# Altium PCB DMX Interface.PcbDoc (part 3 of 3)
Units mm, origin at the board's own origin, x right, y up, seen from the top; angles counter-clockwise.
Board outline 110 x 81.5 mm, 4 copper layers (Top Layer, Int1 (GND), Int2 (PWR), Bottom Layer), stack 1.586 mm thick; 144 components, 113 nets, 496 pads, 326 vias.
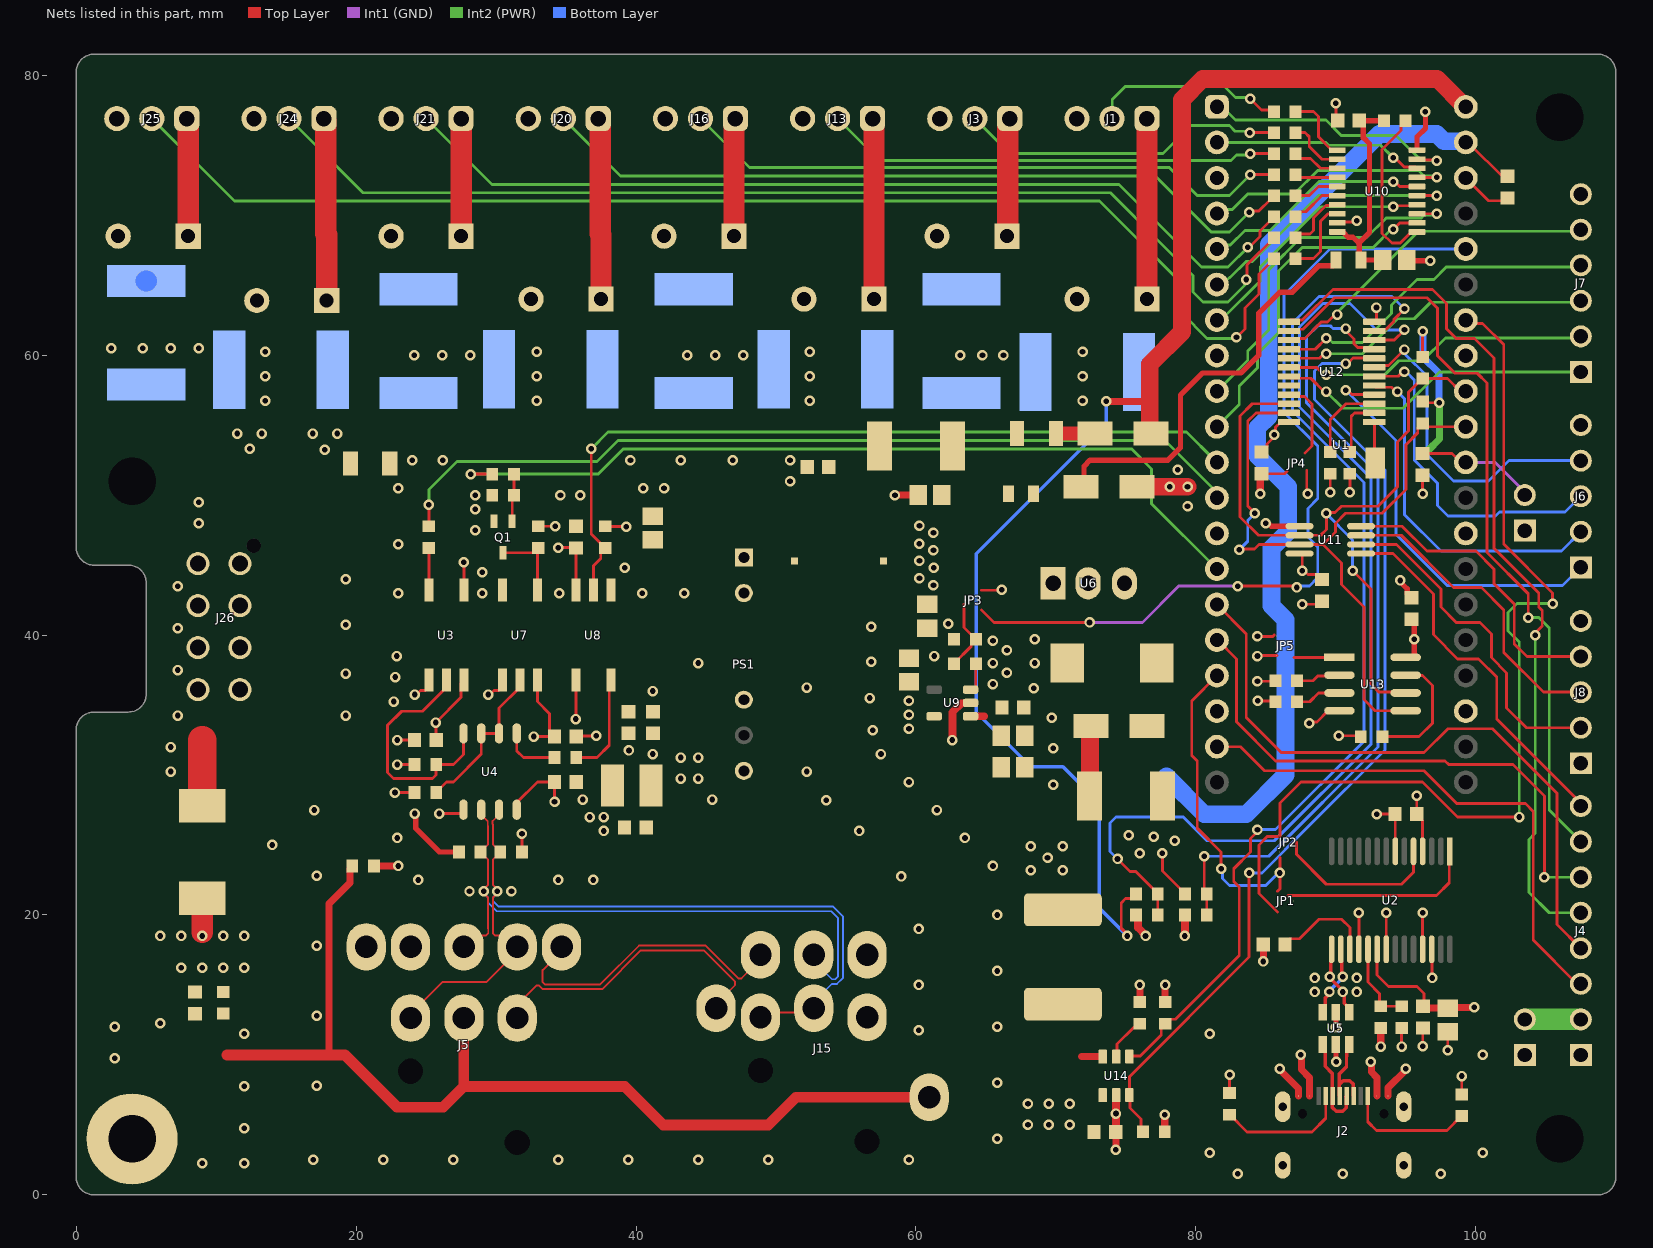
[diagram p4: the nets of this part, all layers, seen from the top]

## Part data (continued)
U12: library part CMP-015-00012-2, "16-bit 1.65- to 5.5-V I2C/SMBus I/O expander with interrupt, weak pull-up & config registers", Case/Package=TSSOP, Max Operating Temperature=85°C, Max Supply Voltage=5.5V, Min Operating Temperature=-40°C, Min Supply Voltage=1.65V, Nominal Supply Voltage=1.8V, Pins=24, RoHS Compliant=Yes
U13: library part CMP-019-00078-2, "M24C02 Series 2 Kb (256 x 8) 1.8 V SMT Serial I²C Bus EEPROM - SOIC-8", Case/Package=SOIC, Clock Frequency=400kHz, JLCPN=C83836, Max Operating Temperature=85°C, Max Supply Voltage=5.5V, Min Operating Temperature=-40°C, Min Supply Voltage=1.8V, FREQUENCY=400kHz, Memory Format=EEPROM, Memory Size=256B, Mounting Technology="Surface Mount", Pins=8
U14: library part CMP-019-00083-1, "IC PWR SWITCH N-CHAN 1: 1 SOT23-6 Power Switch/Driver 1: 1 N-Channel 1.5A SOT-23-6", Case/Package=SOT-23, Max Operating Temperature=85°C, Max Supply Voltage=6.5V, Min Operating Temperature=-40°C, Min Supply Voltage=2.5V, Pins=6

## Via types
v1: diameter 0.75, hole 0.4, Top Layer to Bottom Layer, tented both sides, 322 vias
v2: diameter 0.75, hole 0.4, Top Layer to Bottom Layer, 4 vias

## Nets (pads, with @x,y where several pads share a name; then routed paths per layer and width w, separated by ;. In a path a pad name is that pad's centre, name@x,y a point inside that pad or via, vN(x,y) a via of type N, cw(c..) or ccw(c..) an arc to the next point about the centre after c; other vN are vias at no path point)
3V3: C10.1 C22.2 C31.2 C32.1 C33.1 C40.2 C42.2 C43.2 C44.1 J4.2 J9.2 JP4.3 JP5.3 L1.1 R1.2 R14.2 R27.2 R28.2 R33.1 R34.1 R35.2 U2.4 U2.20 U3.1 U8.6 U9.5 U11.8 U12.24 U13.8 | length 56
  Top Layer w0.203: U3.1@27.7,43.225 v1(27.7,45.2) ; R1.2@33,47.775 v1(34.225,47.775) ; v1(34.45,46.25) 35.675,46.25 C10.1@35.7,46.225 U8.6@35.7,43.225 ; R14.2@37.8,47.775 37.825,47.75 v1(39.3,47.75) ; v1(84.4,36.7) 85.648,36.7 R33.1@85.683,36.735 ; v1(84.4,38.5) 84.435,38.535 JP5.3@85.783,38.535 ; v1(84.427,35.294) 85.624,35.294 R34.1@85.683,35.235 ; C43.2@84.7,53.075 C43.2@84.725,53.075 ; C43.2@85.073,53.442 85.073,53.639 85.505,54.071 85.505,54.205 v1(85.6,54.3) 85.695,54.395 85.695,54.845 86.075,55.225 U12.24@86.65,55.225 ; U11.8@87.4,45.825 87.509,45.825 87.6,45.734 v1(87.6,44.6) 87.734,44.6 88.011,44.323 88.652,44.323 C42.2@89,43.975 ; 87.922,51.778 87.922,50.178 v1(88,50.1) ; U2.20@92.948,17.551 92.948,15.704 93.751,14.901 95.793,14.901 96.293,14.401 96.293,13.551 C32.1@96.218,13.476 C32.1@96.345,13.35 ; U13.8@94.987,38.405 95.462,38.405 U13.8@95.6,38.543 ; C44.1@95.4,41.125 C44.1@95.425,41.1 ; C44.1@95.4,41.4 C44.1@95.575,41.225 ; C44.1@95.575,40.925 C44.1@95.6,40.9 ; v1(95.784,28.517) 95.784,27.166 96.198,26.752 U2.4@96.198,24.551 ; R28.2@96.2,56.675 96.275,56.6 v1(97.4,56.6) ; R27.2@96.2,59.875 v1(96.2,61.7) ; C31.2@98,13.35 C31.2@98.05,13.4
  Top Layer w0.381: U13.8@95.6,38.543 C44.1@95.6,40.9
  Top Layer w0.508: R35.2@77.8,13.775 v1(77.8,15) ; C32.1@96.345,13.35 C31.2@98,13.35 ; C31.2@98.05,13.4 v1(99.9,13.4)
  Int2 (PWR) w0.508: 96.6,53.2 97.4,54 v1(97.4,56.6)
  Int2 (PWR) w1.524: J9.2@103.5,12.54 J4.2@107.5,12.54
  Bottom Layer w0.508: v1(96.2,61.7) 96.237,61.663 96.237,59.847 97.363,58.721 97.363,56.637 v1(97.4,56.6)
  other v1: 59.5,33.3 59.5,34.3 59.5,35.3 95.6,39.7 61.25,43.55 60.25,44.05 61.269,44.819 60.25,45.3 61.25,46.05 60.231,46.531 61.25,47.3 60.25,47.8
3V3ISO: C5.2 C8.1 C9.2 C12.1 C13.2 C14.2 C16.2 PS1.7 R7.2 R8.2 R10.2 U3.6 U4.8 U7.6 U8.1 | length 26.6
  Top Layer w0.203: v1(22.775,28.75) R7.2@24.175,28.75 ; v1(22.95,30.75) R8.2@24.175,30.75 ; C5.2@25.725,32.5 25.7,32.525 v1(25.7,33.75) 27.502,35.552 27.502,36.577 U3.6@27.7,36.775 ; U4.8@31.48,27.525 31.48,28.03 32.95,29.5 C8.1@34.2,29.5 ; v1(32.7,32.75) C9.2@34.175,32.75 33.827,33.098 33.827,34.373 32.95,35.25 U7.6@32.95,36.775 ; v1(34.175,28.1) C8.1@34.175,29.5 ; v1(35.7,34) U8.1@35.7,36.775
  Top Layer w0.381: v1(24.2,27.25) 24.263,27.187 24.263,26.187 25.95,24.5 R10.2@27.35,24.5
  other v1: 43.2,29.75 44.45,29.75 43.2,31.25 44.45,31.25 41.2,31.5 39.494,31.752
5V_LOGIC: C17.1 D2.2 D4.1 L2.2 L3.1 U6.3 | length 30
  Top Layer w0.381: D2.2@71.585,50.385 72,50.8 72,52.054 72.446,52.5 78.008,52.5 78.9,53.392 78.9,57.15 80.47,58.72 83.22,58.72 84.5,60 84.5,63 86,64.5 86.9,64.5 88.79,66.39 89.79,66.39 90,66.6 L3.1@90,66.8
5V_LVL_SHIFT: C23.2 C41.2 L3.2 R5.2 U10.20 | length 15.8
  Top Layer w0.381: U10.20@90.1,68.8 90.5,68.8 90.881,68.419 91.22,68.419 91.639,68 ; C41.2@93.35,66.8 L3.2@91.8,66.8 91.668,66.932 91.668,67.768 91.668,67.972 91.639,68 ; R5.2@93.425,76.75 C23.2@91.675,76.75 91.96,76.466 91.96,75.54 92.4,75.1 92.4,68.761 91.639,68
AuxDMX_n: J5.5PIN_4 J15.5PIN_4 | length 21.7
  Top Layer w0.132: J5.5PIN_4@31.51,12.64 31.51,13.595 32.867,14.952 33.086,14.952 33.339,14.699 37.573,14.699 40.348,17.474 44.839,17.474 47.077,15.236 47.077,14.997 45.72,13.64 J15.5PIN_4@45.72,13.34
AuxDMX_p: J5.5PIN_5 J15.5PIN_5 | length 21.7
  Top Layer w0.132: J5.5PIN_5@34.68,17.72 34.68,17.42 33.323,16.063 33.323,15.189 33.478,15.034 37.434,15.034 40.209,17.809 44.978,17.809 47.314,15.473 47.533,15.473 48.89,16.83 J15.5PIN_5@48.89,17.15
BTN_DOWN: J6.1 U12.4 | length 29.2
  Top Layer w0.203: v1(90.7,57.5) 90.834,57.5 91.159,57.175 U12.4@92.75,57.175
  Bottom Layer w0.203: v1(90.7,57.5) 94.3,53.9 94.3,47.2 97.957,43.543 106.203,43.543 J6.1@107.5,44.84
BTN_ESC: J6.4 U12.7 | length 23.2
  Top Layer w0.203: U12.7@92.75,59.125 92.873,59.248 93.748,59.248 v1(94.9,60.4)
  Bottom Layer w0.203: v1(94.9,60.4) 94.995,60.305 94.995,60.005 96.5,58.5 96.5,52.898 98.398,51 100.9,51 102.36,52.46 J6.4@107.5,52.46
BTN_SELECT: J6.3 U12.6 | length 24
  Top Layer w0.203: U12.6@92.75,58.475 92.762,58.488 94.453,58.488 94.766,58.8 v1(94.9,58.8)
  Bottom Layer w0.203: v1(94.9,58.8) 95.034,58.8 95.6,58.234 95.6,52.5 97.255,50.845 97.255,49.245 98,48.5 101.4,48.5 101.7,48.8 106.38,48.8 J6.3@107.5,49.92
BTN_UP: J6.2 U12.5 | length 25.1
  Top Layer w0.203: U12.5@92.75,57.825 92.873,57.702 93.964,57.702 94.266,57.4 v1(94.4,57.4)
  Bottom Layer w0.203: v1(94.4,57.4) 94.4,57.389 94.9,56.889 94.9,48.6 97.5,46 106.12,46 J6.2@107.5,47.38
CHGND: C1.1 J5.G J15.G PTH3.1 R3.2 R4.1 | length 73.4
  Top Layer w0.508: 18.05,10 18.05,20.8 19.554,22.304 19.554,23.329 R3.2@19.725,23.5
  Top Layer w0.762: 10.775,10 18.05,10 19.2,10 22.926,6.274 26.224,6.274 27.7,7.75 ; J5.G@27.7,12.64 27.7,7.75 ; J15.G@60.95,6.98 51.43,6.98 49.45,5 41.95,5 39.2,7.75 27.7,7.75
  other v1: 9,2.25 12,2.25 12,4.75 12,7.75 2.75,9.75 12,11.5 2.75,12 6,12.25
DISPLAY.BL: J4.8 U11.1 | length 26.8
  Top Layer w0.203: U11.1@91.8,45.825 94.075,45.825 96.966,42.934 96.966,40.034 98.7,38.3 100.2,38.3 101.5,37 101.5,34 107.5,28 J4.8@107.5,27.78
DISPLAY.CS: J4.7 U12.14 | length 55.6
  Top Layer w0.203: U12.14@86.65,61.725 86.773,61.848 87.648,61.848 89.9,64.1 96.5,64.1 97.25,63.35 97.25,59.95 98.5,58.7 100.1,58.7 100.8,58 100.8,45.9 103.75,42.95 v1(103.75,41.25)
  Int2 (PWR) w0.203: v1(103.75,41.25) 104.5,41.25 105.25,40.5 105.25,27.49 J4.7@107.5,25.24
DISPLAY.DC: J4.6 U1.16 | length 39.1
  Top Layer w0.203: U1.16@81.5,39.64 81.56,39.64 82.9,38.3 82.9,33.8 85.693,31.007 97.793,31.007 98.06,30.74 102.66,30.74 104.9,28.5 v1(104.9,22.7)
  Int2 (PWR) w0.203: v1(104.9,22.7) J4.6@107.5,22.7
DISPLAY.MOSI: J4.4 U1.15 | length 46.6
  Top Layer w0.203: U1.15@81.5,42.18 83.6,40.08 83.6,34.1 86.1,31.6 96.3,31.6 98,33.3 101.2,33.3 105.8,28.7 105.8,19.32 J4.4@107.5,17.62
DISPLAY.RES: J4.5 U12.13 | length 63
  Top Layer w0.203: U12.13@86.65,62.375 86.773,62.498 87.598,62.498 89.8,64.7 96.9,64.7 97.911,63.689 97.911,61.889 98.6,61.2 99.9,61.2 101.3,59.8 101.3,46.2 104.5,43 104.5,42 104.75,41.75 104.75,40.648 104.25,40.148 v1(104.25,40)
  Int2 (PWR) w0.203: v1(104.25,40) 104.25,25.85 103.8,25.4 103.8,21.6 105.24,20.16 J4.5@107.5,20.16
DISPLAY.SCK: J4.3 U1.19 | length 38.4
  Top Layer w0.203: U1.19@81.5,32.02 83.18,32.02 84.9,30.3 96.3,30.3 98.64,27.96 103.54,27.96 104.1,27.4 104.1,18.2 107.22,15.08 J4.3@107.5,15.08
DMX.EN: R12.1 U1.14 | length 60.6
  Top Layer w0.203: v1(28.2,51.5) R12.1@29.725,51.5
  Int2 (PWR) w0.203: v1(28.2,51.5) 37.3,51.5 39.081,53.281 75.419,53.281 76.835,51.865 76.835,49.385 U1.14@81.5,44.72
DMX.RX: R14.1 U1.11 U8.5 | length 57.5
  Top Layer w0.203: v1(36.8,53.3) 36.8,47.225 37.477,46.548 37.477,46.523 R14.1@37.775,46.225 ; U8.5@36.95,43.725 U8.5@36.95,43.225 U8.5@36.95,43.725 ; U8.5@36.95,43.725 36.95,44.95 37.477,45.477 37.477,45.927 R14.1@37.775,46.225 ; R14.1@37.775,46.225 R14.1@37.8,46.225 R14.1@37.775,46.225
  Int2 (PWR) w0.203: v1(36.8,53.3) 38,54.5 79.34,54.5 81.311,52.529 U1.11@81.5,52.34
DMX.TX: R9.1 U1.12 | length 62.3
  Top Layer w0.203: R9.1@25.2,47.775 v1(25.2,49.3)
  Int2 (PWR) w0.203: v1(25.2,49.3) 25.2,50.4 27.2,52.4 37.2,52.4 38.7,53.9 77.8,53.9 80.8,50.9 80.8,50.891 81.5,50.191 U1.12@81.5,49.8
DMX_n: J5.3PIN_2 J5.5PIN_2 J15.3PIN_2 J15.5PIN_2 R11.2 U4.7 | length 58.8
  Top Layer w0.132: J5.5PIN_2@23.89,12.64 23.89,12.94 26.15,15.2 29.29,15.2 31.51,17.42 J5.3PIN_2@31.51,17.72 ; U4.7@30.21,27.525 30.21,27.179 29.743,26.711 29.743,26.492 29.768,26.467 29.768,25.039 29.922,24.884 29.941,24.884 30.3,24.525 R11.2@30.3,24.5 30.3,24.475 29.941,24.116 29.922,24.116 29.768,23.961 29.768,23.449 29.767,22.164 30.075,21.856 v1(30.075,21.7) 30.075,21.544 29.767,21.236 29.767,19.184 29.773,19.179 29.773,18.698 29.94,18.53 J5.3PIN_2@30.7,18.53 ; J15.3PIN_2@48.89,12.7 49.21,13.02 52.38,13.02 J15.5PIN_2@52.7,13.34
  Bottom Layer w0.132: v1(30.075,21.7) 30.075,21.544 29.767,21.236 29.767,21.012 30.179,20.6 30.8,20.6 54.083,20.6 54.775,19.908 54.775,15.495 54.358,15.077 54,15.077 52.7,13.777 J15.5PIN_2@52.7,13.34
DMX_p: J5.3 J15.3 R10.1 U4.6 | length 45.2
  Top Layer w0.132: J5.3@27.7,17.72 28.51,18.53 29.27,18.53 29.437,18.698 29.437,19.04 29.432,19.045 29.432,21.236 29.125,21.544 v1(29.125,21.7) 29.125,21.856 29.432,22.164 29.432,23.587 29.432,23.961 29.278,24.116 29.259,24.116 28.9,24.475 R10.1@28.9,24.5 ; R10.1@28.9,24.525 29.259,24.884 29.278,24.884 29.432,25.039 29.432,26.329 29.407,26.354 29.407,26.711 28.94,27.179 U4.6@28.94,27.525
  Bottom Layer w0.132: v1(29.125,21.7) 29.125,21.544 29.432,21.236 29.432,20.873 30.04,20.265 30.8,20.265 53.944,20.265 54.44,19.769 54.44,15.634 54.219,15.413 54,15.413 52.7,16.713 J15.3@52.7,17.15
EN_GATE: Q1.G R2.2 R12.2 | length 3.4
  Top Layer w0.203: Q1.G@31.15,48.125 31.15,49.875 R2.2@31.275,50 R12.2@31.275,51.5
EN_LDO: R26.2 U9.3 | length 2.1
  Top Layer w0.203: U9.3@63.9,36.1 64.08,36.1 64.275,36.295 R26.2@64.275,37.95
EN_LED: Q1.D R1.1 U7.1 | length 5.6
  Top Layer w0.203: Q1.D@30.5,45.875 32.625,45.875 R1.1@32.95,46.2 ; U7.1@32.95,43.225 32.95,46.175 R1.1@33,46.225
EXP_P12: J7.5 U12.15 | length 24.2
  Top Layer w0.203: U12.15@86.65,61.075 86.773,61.198 87.798,61.198 88.96,62.36 89.412,62.36 89.952,62.9 v1(90.1,62.9)
  Int2 (PWR) w0.203: v1(90.1,62.9) 90.1,63.048 95.9,68.848 107.388,68.848 J7.5@107.5,68.96
EXP_P13: J7.4 U12.16 | length 23.9
  Top Layer w0.203: U12.16@86.65,60.425 88.525,60.425 v1(89.3,61.2)
  Int2 (PWR) w0.203: v1(89.3,61.2) 89.448,61.2 89.748,60.9 91.9,60.9 93.985,62.985 93.985,63.585 95.8,65.4 97,65.4 97.892,66.292 107.372,66.292 J7.4@107.5,66.42
EXP_P14: J7.3 U12.17 | length 22.6
  Top Layer w0.203: U12.17@86.65,59.775 88.827,59.775 89.152,60.1 v1(89.3,60.1)
  Int2 (PWR) w0.203: v1(89.3,60.1) 91.9,60.1 94.4,62.6 95.6,62.6 96.781,63.781 107.401,63.781 J7.3@107.5,63.88
EXP_P15: J7.2 U12.18 | length 22.2
  Top Layer w0.203: U12.18@86.65,59.125 86.663,59.113 88.64,59.113 89.152,58.6 v1(89.3,58.6)
  Int2 (PWR) w0.203: v1(89.3,58.6) 93.496,58.6 94.496,59.6 96.2,59.6 97.825,61.225 107.385,61.225 J7.2@107.5,61.34
EXP_P16: J7.1 U12.19 | length 22.9
  Top Layer w0.203: U12.19@86.65,58.475 86.773,58.352 88.202,58.352 89.154,57.4 v1(89.3,57.4)
  Int2 (PWR) w0.203: v1(89.3,57.4) 90.5,56.2 94.795,56.2 97.395,58.8 J7.1@107.5,58.8
EXP_P17: U12.20 | length 0.1
  Top Layer w0.203: U12.20@86.65,57.825 U12.20@86.748,57.727
FTDI.RX: JP1.3 JP2.1 U1.34 | length 70
  Top Layer w0.203: 85.825,20.201 84.502,21.524 84.502,25.002 85.1,25.6 86,25.6 JP2.1@86,25.9 86,28 87.5,29.5 96.2,29.5 98.7,27 v1(103.1,27) ; U1.34@99.28,62.5 99.517,62.263 100.487,62.263 102,60.75 102,46.5 105.485,43.015 105.485,42.265 v1(105.5,42.25)
  Int2 (PWR) w0.203: v1(103.1,27) 103.1,39.5 102.3,40.3 102.3,41.6 102.95,42.25 v1(105.5,42.25)
FTDI.TX: JP1.1 JP2.3 U1.17 | length 23.3
  Top Layer w0.203: U1.17@81.5,37.1 79.7,35.3 79.7,31.4 80.1,31 80.1,26.2 81.8,24.5 v1(81.8,23.3) ; JP1.1@85.825,21.7 86,21.875 86,24.109
  Bottom Layer w0.203: v1(81.8,23.3) 81.905,23.195 81.905,22.595 82.4,22.1 84.989,22.1 85.889,23 v1(86,23)
GND: C1.2 C2.1 C3.2 C4.1 C6.2 C7.2 C10.2 C11.2 C15.1 C17.2 C18.2 C22.1 C23.1 C24.2 C26.2 C28.2 C29.2 C30.2 C31.1 C32.2 C33.2 C34.2 C36.2 C38.1 C39.1 C40.1 C41.1 C42.1 C43.1 C44.2 C45.1 D1.2 J1.3 J2.1 J2.2 J2.3 J2.4 J2.A1B12 J2.B1A12 J3.3 J4.1 J6.5 J7.6 J8.1 J8.5 J9.1 J13.3 J14.1 J16.3 J20.3 J21.3 J24.3 J25.3 J26.1 J26.2 J26.3 J26.4 JP4.1 JP5.1 PS1.2 Q1.S R2.1 R4.2 R22.2 R23.2 R25.1 R29.2 R30.2 R31.1 R32.2 R36.2 R37.1 R38.2 R40.1 R42.1 U1.3 U1.8 U1.13 U1.18 U1.23 U1.28 U1.33 U1.38 U2.7 U2.18 U2.21 U2.25 U2.26 U5.2 U6.2 U7.3 U8.4 U9.2 U10.10 U10.19 U11.5 U12.12 U13.4 U14.2 | length 76.8
  Top Layer w0.203: U7.3@30.45,43.225 U7.3@30.45,43.725 ; C10.2@35.5,47.975 C10.2@35.7,47.775 ; U8.4@38.2,43.225 U8.4@38.2,43.725 ; v1@39.2,44.725 v1(39.2,44.8) ; R31.1@62.723,39.698 R31.1@62.725,39.7 ; R22.2@82.409,7.284 v1(82.409,8.592) ; v1(84.4,39.9) 85.5,39.9 85.6,40 ; C43.1@84.7,51.525 86.325,51.525 JP4.1@86.5,51.7 ; v1(87.6,42.2) 88.775,42.2 C42.1@89,42.425 ; v1(88.1,33.7) 88.195,33.795 88.644,33.795 89.444,34.595 U13.4@90.255,34.595 ; v1(89.6,50.2) R30.2@89.6,51.525 ; v1(90,78) 90,76.875 C23.1@90.125,76.75 ; U10.19@90.1,69.45 90.173,69.523 91.423,69.523 v1(91.5,69.6) ; v1(90.2,32.8) 91.721,32.8 R32.2@91.78,32.741 ; v1(91,50.2) R29.2@91,51.525 ; U2.18@91.648,17.551 v1(91.648,20.148) ; U12.12@92.75,62.375 92.802,62.375 92.9,62.473 v1(92.9,63.4) ; v1(92.908,27.209) C33.2@94.216,27.209 ; U2.21@93.598,17.551 v1(93.598,20.148) ; C33.2@94.225,27.2 94.248,27.177 U2.7@94.248,24.551 ; v1(94.7,10.6) 94.7,11.908 R25.1@94.718,11.926 ; U2.25@96.198,17.551 v1(96.198,20.148) ; v1(96.2,50.1) C30.2@96.2,51.425 ; v1(96.209,10.609) C32.2@96.209,11.917 ; U2.26@96.848,17.551 96.874,17.525 96.874,15.526 v1(96.9,15.5) ; v1(97.991,10.333) C31.1@97.991,11.641 ; R23.2@98.993,7.185 v1(98.993,8.493) ; U1.38@99.28,72.66 100.915,71.025 C29.2@102.1,71.025
  Top Layer w0.35: v1@89.999,11.994 U5.2@90,13.044
  Top Layer w0.381: C15.1@41.2,48.5 C15.1@41.5,48.8 ; v1(85,48) 85.148,48 85.373,47.775 U11.5@87.4,47.775 ; v1(94.6,43.9) 94.6,43.8 95.09,43.31 95.09,42.96 95.375,42.675 C44.2@95.4,42.675 ; C41.1@95.05,66.8 95.1,66.75 v1(96.75,66.75) ; U10.10@95.8,74.65 95.8,75.6 96.4,76.2 v1(96.4,77.4)
  Top Layer w0.508: v1(58.5,50) C2.1@60.15,50 ; v1(74.285,3.226) C4.1@74.285,4.451 ; R37.1@76,13.775 v1(76,15) ; R38.2@77.775,4.5 v1(77.775,5.725) ; v1(84.6,50.1) C43.1@84.6,51.425 ; v1(84.818,16.676) C34.2@84.818,17.901 ; v1(86,9) 86,8.935 87.325,7.61 J2.A1B12@87.325,7.068 ; J2.B1A12@93.725,7.069 93.725,7.659 95,8.935 v1(95,9)
  Top Layer w0.559: v1(62.6,32.5) 62.6,34.475 63.255,35.129 63.879,35.129 U9.2@63.9,35.15 ; C4.1@74.275,4.5 74.287,4.513 74.287,7.113 U14.2@74.3,7.125 ; R42.1@75.725,20 75.871,19.854 75.871,19.081 76.4,18.552 v1(76.4,18.5) ; v1(79.2,18.5) 79.212,18.513 79.212,19.987 R40.1@79.225,20
  Top Layer w1.524: v1@9,18.75 D1.2@9,21.2
  other v1: 83,1.5 90.5,1.5 97.5,1.5 81,3 100.5,3 65.8,4 74.287,5.813 65.8,8 100.5,10 81,11.5 89.999,11.994 65.8,12 88.5,14.5 91.5,14.5 88.5,15.5 91.5,15.5 65.8,16 7.5,16.225 9,16.225 10.5,16.225 12,16.225 6,18.5 7.5,18.5 9,18.5 10.5,18.5 12,18.5 65.8,20 65.5,23.5 14,25 63.5,25.5 17,27.5 61.5,27.5 69.8,29.3 59.5,29.5 6.75,30.25 57.5,31.5 69.8,31.9 6.75,32 56.9,33.2 69.7,34.1 7.25,34.25 19.25,34.25 56.7,35.5 68.4,36.2 19.25,37.25 7.25,37.5 68.5,38 56.8,38.1 61.3,38.5 68.5,39.7 7.25,40.5 56.8,40.6 19.25,40.75 62.3,40.8 23,43 29,43 34.5,43 40.45,43 43.45,43 7.25,43.5 19.25,44 29,44.5 23,46.5 28.5,47.5 8.75,48 28.5,49 8.75,49.5 28.5,50 34.6,50 36,50 23,50.5 40.5,50.5 42,50.5 51,51 24,52.5 26.2,52.5 39.6,52.5 43.2,52.5 46.9,52.5 51,52.5
GNDISO: C5.1 C8.2 C9.1 C12.2 C13.1 C14.1 C16.1 J5.3PIN_1 J5.5PIN_1 J15.3PIN_1 J15.5PIN_1 PS1.5 R3.1 R11.1 U3.4 U4.5 U7.4 | length 11.8
  Top Layer w0.203: v1(22.95,32.5) C5.1@24.175,32.5 ; v1(24.2,35.75) 24.324,35.75 24.6,36.026 24.951,36.026 25.2,36.275 U3.4@25.2,36.775 ; v1(25.95,27.25) 27.51,27.25 27.67,27.41 U4.5@27.67,27.525 ; v1(29.45,35.75) 29.574,35.75 29.85,36.026 30.201,36.026 30.45,36.275 U7.4@30.45,36.775 ; R11.1@31.85,24.5 v1(31.85,25.8) ; C8.2@35.725,29.5 C8.2@36.073,29.152 ; C9.1@35.725,32.75 35.77,32.795 v1(37.144,32.795) ; v1@36.073,28.498 36.2,28.371 v1(36.2,28.25)
  Top Layer w0.508: R3.1@21.275,23.5 v1(23,23.5)
  other v1: 16.95,2.5 21.95,2.5 26.95,2.5 34.45,2.5 39.45,2.5 44.45,2.5 49.45,2.5 59.5,2.5 17.2,7.805 60.2,11.75 17.2,12.805 60.2,15 17.2,17.805 60.2,19 28.1,21.7 31.1,21.7 24.45,22.5 34.45,22.5 36.95,22.5 58.95,22.75 17.2,22.805 22.95,25.5 37.7,26 55.95,26 36.7,27 37.7,27 53.6,28.2 45.45,28.25 52.2,30.25 22.7,35.25 41.2,36 52.2,36.25 22.8,37 44.45,38 22.9,38.5
I2C.SCL: R27.1 U1.32 U11.6 U12.22 U13.6 | length 53.2
  Top Layer w0.203: U12.22@86.65,56.525 84.025,56.525 83.156,55.656 83.156,48.444 84.475,47.125 U11.6@87.4,47.125 88.925,47.125 89.337,47.537 89.337,48.663 v1(89.3,48.7) 89.344,48.744 89.944,48.744 90.4,49.2 93,49.2 94.4,50.6 94.4,53.8 95.2,54.6 95.2,57.35 96.175,58.325 R27.1@96.2,58.325 97.984,58.325 98.889,57.42 U1.32@99.28,57.42 ; v1(91.2,44.6) 92.5,43.3 92.5,36.5 93.068,35.932 94.92,35.932 U13.6@94.987,35.865
  Bottom Layer w0.203: v1(89.3,48.7) 91.2,46.8 v1(91.2,44.6)
I2C.SDA: R28.1 U1.31 U11.7 U12.23 U13.5 | length 51.1
  Top Layer w0.203: v1(83.1,46.1) 83.152,46.152 84.186,46.152 84.509,46.475 U11.7@87.4,46.475 89.075,46.475 ; v1(84.2,48.7) 84.2,48.713 83.702,49.211 83.702,55.295 84.282,55.875 U12.23@86.65,55.875 ; U13.5@94.987,34.595 92.805,34.595 92,35.4 92,42 90.4,43.6 90.4,45.15 89.075,46.475 ; U1.31@99.28,54.88 96.445,54.88 R28.1@96.2,55.125 96.175,55.125 95.852,54.802 95.852,54.452 95,53.6 95,50.4 93.3,48.7 90.7,48.7 89.974,47.974 89.974,47.374 89.075,46.475
  Bottom Layer w0.203: v1(83.1,46.1) 83.7,46.7 83.7,48.189 84.2,48.689 v1(84.2,48.7)
LED.1: U1.1 U10.9 | length 18.7
  Top Layer w0.203: U10.9@95.8,74 95.85,73.95 97.15,73.95 v1(97.2,73.9)
  Int2 (PWR) w0.203: U1.1@81.5,77.74 81.891,77.74 82.831,76.8 89.286,76.8 90.386,75.7 94.3,75.7 96.1,73.9 v1(97.2,73.9)
LED.2: U1.2 U10.8 | length 15.3
  Top Layer w0.203: v1(94.1,74.1) 94.234,74.1 94.886,73.448 95.702,73.448 U10.8@95.8,73.35
  Int2 (PWR) w0.203: U1.2@81.7,75 U1.2@81.5,75.2 89.279,75.2 89.479,75 93.2,75 v1(94.1,74.1)
LED.3: U1.4 U10.7 | length 18.6
  Top Layer w0.203: U10.7@95.8,72.7 v1(97.2,72.7)
  Int2 (PWR) w0.203: U1.4@81.5,70.12 81.777,70.397 82.597,70.397 83.7,71.5 87,71.5 88.7,73.2 95.9,73.2 96.305,72.795 97.105,72.795 v1(97.2,72.7)
LED.4: U1.5 U10.6 | length 16.4
  Top Layer w0.203: v1(94.1,72.4) 94.218,72.4 94.568,72.05 U10.6@95.8,72.05
  Int2 (PWR) w0.203: U1.5@81.5,67.58 81.777,67.857 82.457,67.857 83.5,68.9 85.3,68.9 88.8,72.4 v1(94.1,72.4)
LED.5: U1.6 U10.5 | length 19.7
  Top Layer w0.203: U10.5@95.8,71.4 v1(97.2,71.4)
  Int2 (PWR) w0.203: U1.6@81.5,65.04 81.891,65.04 82.393,65.542 82.442,65.542 83.6,66.7 84.047,66.7 88.747,71.4 v1(97.2,71.4)
LED.6: U1.7 U10.4 | length 18.3
  Top Layer w0.203: v1(94.1,70.6) 94.175,70.675 95.725,70.675 U10.4@95.8,70.75
  Int2 (PWR) w0.203: U1.7@81.5,62.5 81.8,62.5 84.6,65.3 84.6,66.3 88.9,70.6 v1(94.1,70.6)
LED.7: U1.9 U10.3 | length 25.3
  Top Layer w0.203: U10.3@95.8,70.1 v1(97.2,70.1)
  Int2 (PWR) w0.203: U1.9@81.5,57.42 83.7,59.62 83.7,60.3 85.2,61.8 85.2,66.1 87.5,68.4 92.2,68.4 93.6,69.8 96.1,69.8 96.305,70.005 97.105,70.005 v1(97.2,70.1)
LED.8: U1.10 U10.2 | length 24.3
  Top Layer w0.203: v1(94.1,69) 94.118,69 94.568,69.45 U10.2@95.8,69.45
  Int2 (PWR) w0.203: U1.10@81.5,54.88 83.1,56.48 83.1,57.8 84.4,59.1 84.4,60.1 85.9,61.6 85.9,66 87.6,67.7 92.666,67.7 93.966,69 v1(94.1,69)
LED_OUT.1: J1.2 R21.2 | length 14.1
  Top Layer w0.203: v1(83.888,78.312) 84.677,77.523 85.452,77.523 R21.2@85.575,77.4
  Int2 (PWR) w0.203: J1.2@74,76.9 74.023,76.923 74.023,78.273 74.95,79.2 82.033,79.2 82.827,78.406 83.794,78.406 v1(83.888,78.312)
LED_OUT.2: J3.2 R20.2 | length 23.4
  Top Layer w0.203: v1(83.838,75.9) R20.2@85.575,75.9
  Int2 (PWR) w0.203: J3.2@64.2,76.9 66.7,74.4 77.65,74.4 79.65,76.4 82.4,76.4 82.805,75.995 83.743,75.995 v1(83.838,75.9)
LED_OUT.3: J13.2 R16.2 | length 32.6
  Top Layer w0.203: v1(83.873,74.4) R16.2@85.575,74.4
  Int2 (PWR) w0.203: J13.2@54.4,76.9 57.4,73.9 82.5,73.9 82.905,74.305 83.778,74.305 v1(83.873,74.4)
LED_OUT.4: J16.2 R19.2 | length 43.9
  Top Layer w0.203: v1(83.893,72.9) R19.2@85.575,72.9
  Int2 (PWR) w0.203: J16.2@44.6,76.9 48.1,73.4 78.1,73.4 80.1,71.4 82.393,71.4 v1(83.893,72.9)
LED_OUT.5: J20.2 R15.2 | length 55.2
  Top Layer w0.203: v1(83.8,70.2) 83.895,70.295 84.495,70.295 85.329,71.129 85.329,71.154 R15.2@85.575,71.4
  Int2 (PWR) w0.203: J20.2@34.8,76.9 38.9,72.8 77.1,72.8 81.1,68.8 82.4,68.8 v1(83.8,70.2)
LED_OUT.6: J21.2 R18.2 | length 66.7
  Top Layer w0.203: v1(83.7,67.7) 83.8,67.7 84.572,68.472 84.572,68.872 85.575,69.875 R18.2@85.575,69.9
  Int2 (PWR) w0.203: J21.2@25,76.9 29.7,72.2 74.5,72.2 80.4,66.3 82.3,66.3 v1(83.7,67.7)
LED_OUT.7: J24.2 R6.2 | length 79.2
  Top Layer w0.203: v1(83.6,65.4) 83.661,65.461 83.661,66.461 85.575,68.375 R6.2@85.575,68.4
  Int2 (PWR) w0.203: J24.2@15.2,76.9 20.5,71.6 73.9,71.6 79.8,65.7 79.8,64.5 80.5,63.8 82.3,63.8 83.505,65.005 83.505,65.305 v1(83.6,65.4)
LED_OUT.8: J25.2 R17.2 | length 92
  Top Layer w0.203: v1(82.897,61.272) 83.5,61.875 83.5,63.367 84.5,64.367 84.5,65.8 85.575,66.875 R17.2@85.575,66.9
  Int2 (PWR) w0.203: J25.2@5.4,76.9 11.3,71 73.1,71 79,65.1 79,63 80.8,61.2 82.825,61.2 v1(82.897,61.272)
NetC3_1: C3.1 F12.2 J13.1 | length 15.5
  Top Layer w1.524: J13.1@56.9,76.9 57,76.8 C3.1@57,64
  Bottom Layer w1.016: 56.9,74.346 J13.1@56.9,76.9
NetC6_1: C6.1 F17.1 J25.1 | length 11
  Top Layer w1.524: J25.1@7.9,76.9 8,76.8 C6.1@8,68.5
  Bottom Layer w1.016: J25.1@7.9,76.9 7.904,76.896 7.904,74.342
NetC7_1: C7.1 F16.2 J24.1 | length 15.6
  Top Layer w1.524: J24.1@17.7,76.9 17.838,76.762 17.838,68.666 17.9,68.604 C7.1@17.9,63.9
  Bottom Layer w1.016: 17.642,74.268 J24.1@17.642,76.822
NetC11_1: C11.1 F10.2 J1.1 | length 15.5
  Top Layer w1.524: C11.1@76.5,64 J1.1@76.5,76.9
  Bottom Layer w1.016: 76.523,74.257 J1.1@76.523,76.811
NetC15_2: C15.2 L1.2 PS1.1
NetC18_1: C18.1 F11.1 J3.1 | length 11
  Top Layer w1.524: C18.1@66.5,68.5 66.5,68.604 66.562,68.666 66.562,76.762 J3.1@66.7,76.9
  Bottom Layer w1.016: 66.7,74.346 J3.1@66.7,76.9
NetC24_1: C24.1 F13.1 J16.1 | length 11
  Top Layer w1.524: C24.1@47,68.5 47,76.8 J16.1@47.1,76.9
  Bottom Layer w1.016: 47.1,74.346 J16.1@47.1,76.9
NetC26_1: C26.1 F14.2 J20.1 | length 15.5
  Top Layer w1.524: J20.1@37.3,76.9 37.438,76.762 37.438,68.666 37.5,68.604 C26.1@37.5,64
  Bottom Layer w1.016: 37.3,74.346 J20.1@37.3,76.9
NetC28_1: C28.1 F15.1 J21.1 | length 11
  Top Layer w1.524: C28.1@27.5,68.5 J21.1@27.5,76.9
  Bottom Layer w1.016: 27.5,74.346 J21.1@27.5,76.9
NetC34_1: C34.1 U2.17 | length 7.2
  Top Layer w0.203: C34.1@86.368,17.901 86.368,17.926 86.742,18.3 87.4,18.3 88.8,19.7 90.4,19.7 90.998,19.102 U2.17@90.998,17.551
NetD3_1: D3.1 F18.1 | length 2.8
  Top Layer w1.016: F18.1@70,54.4 D3.1@72.8,54.4
NetD4_2: D4.2 F1.2 | length 5
  Top Layer w1.27: F1.2@72.385,28.5 72.442,28.557 72.442,33.442 D4.2@72.5,33.5
NetJP1_2: JP1.2 U2.1 | length 14.2
  Top Layer w0.203: 86.592,21.4 97.2,21.4 98.1,22.3 98.1,24.504 U2.1@98.148,24.551
NetJP2_2: JP2.2 U2.5 | length 12
  Top Layer w0.203: JP2.2@87.175,25.2 87.175,24.337 89.312,22.2 94.7,22.2 95.548,23.048 U2.5@95.548,24.551
NetJP3_1: JP3.1 U1.36 | length 61.9
  Top Layer w0.203: JP3.1@64.675,41.8 65.575,40.9 v1(72.4,40.9) ; v1(83,43.5) 87.1,43.5 v1(87.2,43.4)
  Int1 (GND) w0.203: v1(72.4,40.9) 76.174,40.9 78.774,43.5 v1(83,43.5)
  Bottom Layer w0.203: v1(87.2,43.4) 87.305,43.505 88.105,43.505 88.7,44.1 88.7,46.3 88,47 88,49.049 88.7,49.749 88.7,53.5 86.3,55.9 86.3,64.3 89.58,67.58 U1.36@99.28,67.58
NetJP3_2: JP3.2 R26.1 R31.2 | length 5.3
  Top Layer w0.203: R26.1@62.725,37.95 62.725,37.975 63.952,39.202 63.952,39.377 R31.2@64.275,39.7 64.275,39.725 63.952,40.048 63.927,40.048 63.425,40.55 63.425,42.2
NetJP4_2: JP4.2 U12.21 | length 5.6
  Top Layer w0.203: U12.21@86.65,57.175 86.773,57.052 87.748,57.052 88.3,56.5 88.3,53.5 87.8,53
NetJP5_2: JP5.2 U13.1 | length 3.3
  Top Layer w0.203: 87,38.405 U13.1@90.255,38.405
NetR5_1: R5.1 U10.1 | length 11.9
  Top Layer w0.203: R5.1@94.975,76.75 94.652,76.427 94.652,76.052 93.3,74.7 93.3,68.7 94,68 94.6,68 95.197,68.597 95.4,68.8 U10.1@95.8,68.8
NetR6_1: R6.1 U10.17 | length 4.5
  Top Layer w0.203: R6.1@87.125,68.4 87.387,68.662 88.162,68.662 88.4,68.9 88.4,69.8 89.3,70.7 90.05,70.7 U10.17@90.1,70.75
NetR7_1: R7.1 U4.2 U4.3 U7.5 | length 11.6
  Top Layer w0.203: R7.1@25.7,28.75 26.45,29.5 26.95,29.5 28.94,31.49 U4.3@28.94,32.975 U4.2@30.21,32.975 30.21,34.785 31.7,36.275 U7.5@31.7,36.775 ; R7.1@25.725,28.725 R7.1@25.725,28.75
NetR8_1: R8.1 U3.5 U4.4 | length 17.5
  Top Layer w0.203: R8.1@25.7,30.75 26.95,30.75 27.67,31.47 U4.4@27.67,32.975 ; R8.1@25.725,30.75 25.7,30.725 25.7,30 25.45,29.75 22.675,29.75 22.25,30.175 22.25,33.55 23.26,34.56 24.735,34.56 26.45,36.275 U3.5@26.45,36.775
NetR9_2: R9.2 U3.3 | length 3
  Top Layer w0.203: U3.3@25.2,43.225 R9.2@25.2,46.225
NetR13_1: R13.1 U8.3 | length 7.4
  Top Layer w0.203: R13.1@35.725,31.25 37.2,31.25 38.082,32.132 38.082,36.657 U8.3@38.2,36.775
NetR13_2: R13.2 U4.1 | length 4.2
  Top Layer w0.203: U4.1@31.48,32.975 31.48,31.72 31.95,31.25 R13.2@34.2,31.25
NetR15_1: R15.1 U10.15 | length 3.2
  Top Layer w0.203: R15.1@87.125,71.4 88.1,71.4 88.75,72.05 U10.15@90.1,72.05
NetR16_1: R16.1 U10.13 | length 3.4
  Top Layer w0.203: R16.1@87.125,74.4 87.125,74.375 87.448,74.052 88.198,74.052 88.9,73.35 U10.13@90.1,73.35
NetR17_1: R17.1 U10.18 | length 5.6
  Top Layer w0.203: R17.1@87.125,66.9 88.4,66.9 88.9,67.4 88.9,69.562 89.438,70.1 U10.18@90.1,70.1
NetR18_1: R18.1 U10.16 | length 3.6
  Top Layer w0.203: R18.1@87.125,69.9 87.125,69.923 87.448,70.246 87.846,70.246 89,71.4 U10.16@90.1,71.4
NetR19_1: R19.1 U10.14 | length 2.9
  Top Layer w0.203: R19.1@87.225,72.8 87.325,72.7 U10.14@90.1,72.7
NetR20_1: R20.1 U10.12 | length 4.2
  Top Layer w0.203: R20.1@87.125,75.9 87.8,75.9 88.1,75.6 88.1,74.9 89,74 U10.12@90.1,74
NetR21_1: R21.1 U10.11 | length 5
  Top Layer w0.203: R21.1@87.125,77.4 88.4,77.4 88.75,77.05 88.75,75.6 89.7,74.65 U10.11@90.1,74.65
NetR24_1: R24.1 R25.2 U2.19 | length 6
  Top Layer w0.203: U2.19@92.298,17.551 92.298,15.202 93.126,14.374 93.126,13.569 R24.1@93.218,13.476 R25.2@94.718,13.476
NetR29_1: R29.1 U12.2 | length 4.4
  Top Layer w0.203: R29.1@91,53.075 91.1,53.175 91.1,55.637 91.338,55.875 U12.2@92.75,55.875
NetR30_1: R30.1 U12.3 | length 5.9
  Top Layer w0.203: R30.1@89.6,53.075 89.6,55.4 90.725,56.525 U12.3@92.75,56.525
NetR32_1: R32.1 U13.7 | length 8.9
  Top Layer w0.203: R32.1@93.33,32.741 95.941,32.741 96.9,33.7 96.9,36.4 96.2,37.1 95.022,37.1 U13.7@94.987,37.135
NetR33_2: R33.2 U13.2 | length 3.2
  Top Layer w0.203: R33.2@87.233,36.735 88.369,36.735 88.703,37.068 90.188,37.068 U13.2@90.255,37.135
NetR34_2: R34.2 U13.3 | length 3.3
  Top Layer w0.203: R34.2@87.233,35.235 88.135,35.235 88.765,35.865 U13.3@90.255,35.865
NetTP1_1: TP1.1 U12.1 | length 2.9
  Top Layer w0.203: U12.1@92.75,55.225 92.75,52.35 TP1.1@92.8,52.3
PWM.1: J8.2 U11.2 | length 24.3
  Top Layer w0.203: U11.2@91.8,46.475 94.325,46.475 97.5,43.3 97.5,42 98.6,40.9 100.3,40.9 101.114,40.086 101.114,38.386 102.2,37.3 102.2,34.8 103.62,33.38 J8.2@107.5,33.38
PWM.2: J8.3 U11.3 | length 22.1
  Top Layer w0.203: U11.3@91.8,47.125 94.675,47.125 98.4,43.4 100.4,43.4 102,41.8 102,38.75 104.83,35.92 J8.3@107.5,35.92
PWM.3: J8.4 U11.4 | length 21.8
  Top Layer w0.203: U11.4@91.8,47.775 94.725,47.775 96.5,46 100,46 101.3,44.7 101.3,43.66 102.75,42.21 102.75,39.365 103.655,38.46 J8.4@107.5,38.46
RP_RUN: C30.1 J14.2 U1.30 | length 8.7
  Top Layer w0.203: C30.1@96.2,52.975 98.294,52.975 98.929,52.34 U1.30@99.28,52.34
  Int1 (GND) w0.203: U1.30@99.28,52.34 101.383,52.34 103.5,50.223 J14.2@103.5,50
USB2.D_N: U2.16 U5.3 | length 5.2
  Top Layer w0.247: U5.3@89.05,13.044 89.226,13.22 89.226,14.048 89.544,14.366 v1(89.544,14.502) ; U2.16@90.348,17.551 90.348,16.71 90.404,16.654 90.404,15.696 v1(90.5,15.6)
  Bottom Layer w0.247: v1(89.544,14.502) 89.544,14.573 90.5,15.529 v1(90.5,15.6)
USB2.D_P: U2.15 U5.1 | length 5.1
  Top Layer w0.247: U2.15@89.698,17.551 89.698,16.71 89.646,16.658 89.646,15.696 v1(89.55,15.6) 89.55,15.522 90.494,14.578 v1(90.494,14.5) 90.591,14.404 90.591,13.703 90.95,13.344 U5.1@90.95,13.044
USB2_CC1: J2.A5 R22.1 | length 9.4
  Top Layer w0.203: R22.1@82.4,5.725 82.425,5.725 83.65,4.5 88.3,4.5 89.275,5.475 J2.A5@89.275,7.069
USB2_CC2: J2.B5 R23.1 | length 9.2
  Top Layer w0.203: J2.B5@92.275,7.069 92.275,5.225 92.9,4.6 97.933,4.6 98.959,5.626 R23.1@98.984,5.626
USB2Conn.D_N: J2.A7 J2.B7 U5.4 | length 6.9
  Top Layer w0.247: U5.4@89.05,10.744 89.24,10.553 89.24,9.179 89.757,8.663 89.757,7.067 J2.B7@89.797,7.026 ; J2.B7@89.757,7.067 89.757,6.235 90.014,5.978 90.505,5.978 90.75,6.224 90.75,6.992 J2.A7@90.716,7.026
USB2Conn.D_P: J2.A6 J2.B6 U5.6 | length 6
  Top Layer w0.247: J2.A6@90.257,7.067 90.257,8.655 90.759,9.157 90.759,9.906 90.774,9.92 90.774,10.567 U5.6@90.95,10.744 ; 90.264,7.91 90.509,8.155 91,8.155 91.257,7.899 J2.B6@91.257,7.067
USB_LED_EN: R38.1 U12.8 U14.3 | length 69.6
  Top Layer w0.203: R38.1@76.225,4.5 76.079,4.646 76.079,5.421 75.297,6.203 75.297,6.878 75.25,6.925 75.25,8.444 83.8,16.994 v1(83.8,23) ; v1(90.7,59.4) 90.848,59.4 91.235,59.788 92.738,59.788 U12.8@92.75,59.775
  Bottom Layer w0.203: v1(83.8,23) 84.714,23 88.014,26.3 93.5,31.786 93.5,51.8 88.468,56.832 88.468,58.868 89,59.4 v1(90.7,59.4)
USB_LED_FLT: R35.1 U12.11 U14.4 | length 75.3
  Top Layer w0.203: U14.4@75.25,9.875 75.303,9.928 76.028,9.928 77.529,11.429 77.529,11.954 78.121,12.546 78.546,12.546 83.1,17.1 83.1,22 82.7,22.4 82.7,23.3 83.9,24.5 83.9,25.452 84.4,25.952 v1(84.4,26.1) ; U12.11@92.75,61.725 92.873,61.848 93.575,61.848 94.132,62.405 94.132,62.532 v1(94.9,63.3)
  Bottom Layer w0.203: v1(84.4,26.1) 85.693,26.1 92,32.407 92,50.9 86.9,56 86.9,62.3 88.8,64.2 94,64.2 v1(94.9,63.3)
USB_LED_ILIM: R37.2 U14.5 | length 2.6
  Top Layer w0.203: U14.5@74.3,9.875 74.372,9.947 74.372,10.772 R37.2@75.583,11.983
V_BUS_FTDI: C4.2 F1.1 J2.A4B9 J2.B4A9 R24.2 R39.2 U5.5 U14.1 | length 11.9
  Top Layer w0.203: v1(77.6,24.4) 77.614,24.386 77.614,23.136 79.225,21.525 R39.2@79.225,21.5
  Top Layer w0.35: U5.5@90,10.744 90.008,10.735 90.008,9.523 v1(90.017,9.515)
  Top Layer w0.508: v1(87.5,10) 87.546,9.954 87.546,8.954 88.125,8.375 J2.A4B9@88.125,7.068 ; v1(92.5,9.5) 92.546,9.454 92.546,8.776 92.925,8.397 J2.B4A9@92.925,7.069 ; v1(93.2,10.6) 93.209,10.609 93.209,11.917 R24.2@93.218,11.926
  other v1: 68,5 69.5,5 71,5 68,6.5 69.5,6.5 71,6.5 76,24.4 78.5,25.3 77,25.6 75.2,25.7
V_BUS_RPI: D3.2 R41.2 U1.40 | length 101.4
  Top Layer w0.203: v1(75.1,18.5) 75.1,18.613 74.661,19.052 74.661,20.861 74.977,21.177 75.427,21.177 75.725,21.475 R41.2@75.725,21.5
  Top Layer w0.508: v1(73.6,56.7) 76.7,56.7
  Top Layer w1.27: D3.2@76.8,54.4 76.7,54.5 76.7,56.7 76.7,59.351 79,61.651 79,78.25 80.488,79.738 97.234,79.738 U1.40@99.232,77.74
  Top Layer w1.524: U1.40@99.232,77.74 U1.40@99.28,77.74
  Bottom Layer w0.254: v1(73.6,56.7) 73.6,55.1 64.317,45.817 64.317,34.483 68.2,30.6 70.5,30.6 73.1,28 73.1,20.5 v1(75.1,18.5)
V_LED: C36.1 D1.1 F2.1 F9.1 F10.1 F11.2 F12.1 F13.2 F14.1 F15.2 F16.1 F17.2 F18.2 J26.5 J26.6 J26.7 J26.8 R36.1 | length 4.7
  Top Layer w2.032: D1.1@9,27.8 9,32.5
  other v1: 68.2,23.2 70.5,23.2 69.4,24.1 68.2,24.9 70.5,24.9 17.75,53.25 12.4,53.3 11.5,54.4 13.25,54.4 16.9,54.4 18.65,54.4 13.5,56.75 32.9,56.75 52.4,56.75 71.9,56.75 13.5,58.5 32.9,58.5 52.4,58.5 71.9,58.5 24.15,60 26.15,60 28.15,60 43.65,60 45.65,60 47.65,60 63.15,60 64.75,60 66.25,60 13.5,60.25 32.9,60.25 52.4,60.25 71.9,60.25 2.5,60.5 4.75,60.5 6.75,60.5 8.75,60.5
V_LOGIC_IN: C2.2 F9.2 L2.1 U6.1
V_SYS: C29.1 C38.2 C39.2 C45.2 D2.1 JP3.3 U1.39 U9.1 | length 78.4
  Top Layer w0.203: JP3.3@64.675,43.2 66.105,43.2 v1(66.142,43.237) ; U1.39@99.28,75.2 99.45,75.2 102.075,72.575 C29.1@102.1,72.575
  Top Layer w0.508: U9.1@63.9,34.2 64.9,34.2
  Top Layer w1.27: D2.1@75.8,50.6 v2(79.4,50.6)
  Bottom Layer w1.27: 77.9,29.9 80.6,27.2 83.6,27.2 86.4,30 86.4,41.1 85.4,42.1 85.4,46.2 86.6,47.4 86.6,50.6 84.39,52.81 84.39,54.801 85.2,55.611 85.2,67.9 93.1,75.8 97.211,75.8 97.729,75.282 99.198,75.282 U1.39@99.28,75.2
  other v1: 65.5,36.5 66.5,37.3 65.5,38 66.5,38.9 65.5,39.6
  other v2: 79.4,49.2 78.128,50.6 78.7,51.8
V_USB_LED: F2.2 U14.6 | length 1.5
  Top Layer w0.508: 71.825,9.875 U14.6@73.35,9.875
VBUS_FTDI_DET: R39.1 R40.2 U12.9 | length 57.5
  Top Layer w0.203: v1(80.6,24.2) 80.6,21.6 R39.1@80.7,21.5 ; R40.2@80.775,20 R39.1@80.775,21.5 ; v1(90.7,61.9) 90.7,61.752 91.29,61.162 91.29,60.81 91.562,60.538 92.637,60.538 U12.9@92.75,60.425
  Bottom Layer w0.203: v1(80.6,24.2) 85.207,24.2 93,31.993 93,51.5 87.9,56.6 87.9,61.3 88.7,62.1 89.6,62.1 89.8,61.9 v1(90.7,61.9)
VBUS_RPI_DET: R41.1 R42.2 U12.10 | length 74
  Top Layer w0.203: v1(74.4,24) 75.3,23.1 75.7,23.1 77.275,21.525 R41.1@77.275,21.5 R42.2@77.275,20 ; U12.10@92.75,61.075 94.175,61.075 v1(94.9,61.8)
  Bottom Layer w0.203: v1(74.4,24) 73.868,24.532 73.868,26.568 74.3,27 79.1,27 80.8,25.3 85.6,25.3 92.5,32.2 92.5,51.2 87.4,56.3 87.4,62.021 89.079,63.7 91,63.7 92.9,61.8 v1(94.9,61.8)
pads on no net: J2.A8 J2.B8 J2.NPTH1 J2.NPTH2 J5.NPTH1 J5.NPTH2 J15.NPTH1 J15.NPTH2 J26.9 PS1.6 PTH1.1 PTH2.1 PTH4.1 U1.20 U1.21 U1.22 U1.24 U1.25 U1.26 U1.27 U1.29 U1.35 U1.37 U2.2 U2.3 U2.6 U2.8 U2.9 U2.10 U2.11 U2.12 U2.13 U2.14 U2.22 U2.23 U2.24 U2.27 U2.28 U9.4

## Polygon pours and split planes (outlines as drawn)
V_SYS on Top Layer "V_SYS_L01_P2283" (solid, pour order 2283): 80.1,52.6 80.1,48.1 78.071,48.1 78.071,52.6
GND on Top Layer "GND_L01_P2280" (solid, pour order 2280): 101,0.72 80,0.72 80,12 87,12 87,8 94,8 94,12.401 101,12.401
GND on Top Layer "GND_L01_P2277" (solid, pour order 2277): 66.2,0.5 65.3,0.5 65.3,24.006 66.2,24.006
V_BUS_FTDI on Top Layer "V_BUS_FTDI_L01_P2275" (solid, pour order 2275): 73.672,3.5 66.8,3.5 66.8,7.5 73.672,7.5
V_USB_LED on Top Layer "V_USB_LED_L01_P2274" (solid, pour order 2274): 74.6,12 73.697,11.097 73.671,8.385 66.7,8.385 66.7,16 74.6,16
V_LED on Top Layer "V_LED_L01_P2273" (solid, pour order 2273): 72.9,24.1 74.2,22.8 74.2,17.791 66.7,17.791 66.7,25.8 72.9,25.8
V_SYS on Top Layer "V_SYS_L01_P2271" (solid, pour order 2271): 63.5,34.2 65,34.2 65,40.5 67,40.5 67,28.5 63.5,28.5
GND on Top Layer "GND_L01_P2249" (solid, pour order 2249): 63.4,41.4 63.4,35.15 62.9,35.15 62.9,28.2 70.5,28.2 70.5,26.2 66.2,26.2 66.2,22.5 65.229,22.5 56.4,31.535 56.4,41.4
3V3 on Top Layer "3V3_L01_P2246" (solid, pour order 2246): 61.662,37.3 61.662,32 60.2,32 57.6,34.6 57.6,37.3
V_BUS_FTDI on Top Layer "V_BUS_FTDI_L01_P2269" (solid, pour order 2269): 75.806,23.794 74.6,25 74.6,31.1 79.282,31.1 79.282,23.802
V_LOGIC_IN on Top Layer "V_LOGIC_IN_L01_P2251" (solid, pour order 2251): 66,41 66,44 62.5,44 62.5,49 60.5,49 60.5,55 65,55 65,51.2 67.1,51.2 67.1,46.7 70.559,46.7 70.5,41
V_LED on Top Layer "V_LED_L01_P2255" (solid, pour order 2255): 65.6,52.2 68.7,52.2 68.7,58.29 65.6,58.29
CHGND on Top Layer "CHGND_L01_P2265" (solid, pour order 2265): 1,1 1,13.475 13.458,13.475 13.458,1
3V3ISO on Top Layer "3V3ISO_L01_P2217" (solid, pour order 2217): 38.45,33.5 38.45,31.208 40.45,31.208 40.45,25 49.45,25 49.45,33.5
V_LED on Top Layer "V_LED_L01_P2242" (solid, pour order 2242): 18.4,29.5 8,29.5 8,34 10.1,34 10.1,56.5 20,56.5 20,45.25 18.4,45.25
GND on Top Layer "GND_L01_P2257" (solid, pour order 2257): 53,55.5 53,49.5 48,49.5 48,48 39.5,48 39.5,42.5 22,42.5 22,55.5
5V_LOGIC on Top Layer "5V_LOGIC_L01_P2250" (solid, pour order 2250): 73.529,31.6 73.529,45.071 71.2,47.1 67.529,47.1 67.529,51.9 74.1,51.9 74.1,49.3 78.2,49.3 78.2,31.6
V_LED on Top Layer "V_LED_L01_P2252" (solid, pour order 2252): 53.5,50.7 59.146,50.7 59.146,57 53.5,57
GND on Top Layer "GND_L01_P2247" (solid, pour order 2247): 72,35 70.5,35 70.5,27.7 67.5,27.7 67.5,40.5 72,40.5
GNDISO on Top Layer "GNDISO_L01_P2188" (solid, pour order 2188): 37.5,29.75 37.5,30.75 35.2,30.75 35.2,25 39.7,25 39.7,29.75
3V3 on Top Layer "3V3_L01_P2201" (solid, pour order 2201): 59.5,48.5 59.5,41.6 62,41.6 62,48.5
GNDISO on Top Layer "GNDISO_L01_P2210" (solid, pour order 2210): 38.95,38.536 38.95,34.286 52.787,34.286 52.787,38.536
NetC15_2 on Top Layer "NETC15_2_L01_P2221" (solid, pour order 2221): 48.5,47.5 48.5,48.5 51.5,48.5 51.5,41.75 39.95,41.75 39.95,47.5
GND on Top Layer "GND_L01_P2243" (solid, pour order 2243): 5.5,14 5.5,28.9 18,29 18,26.3 15.2,23.5 15.2,14
V_LED on Top Layer "V_LED_L01_P2241" (solid, pour order 2241): 1.75,62.4 72.7,62.4 72.7,56 1.75,56
CHGND on Int1 (GND) "CHGND_L02_P2266" (solid, pour order 2266): 1,1 1,13.475 13.458,13.475 13.458,1
GNDISO on Int1 (GND) "GNDISO_L02_P2222" (solid, pour order 2222): 21.2,40.25 21.2,29.2 15.2,23.2 15.2,1 64.2,1 64.2,22 55,31.2 55,40.008
GND on Int1 (GND) "GND_L02_P2229" (solid, pour order 2229): 4.734,81.5 107.46,81.5 cw(c107.46,78.96) 110,78.96 110,2.54 cw(c107.46,2.54) 107.46,0 64.2,0 64.2,22.034 55,31.234 55,40.008 33.442,40.008 21.2,40.008 21.2,29.7 15,23.5 15,14.25 0,14.25 0,32.191 cw(c2.309,32.191) 2.309,34.5 2.46,34.5 ccw(c2.46,37.04) 5,37.04 5,42.5 ccw(c2.5,42.5) 2.5,45 cw(c2.5,47.5) 0,47.5 0,78.96 cw(c2.54,78.96) 2.54,81.5
V_SYS on Bottom Layer "V_SYS_L04_P2282" (solid, pour order 2282): 80,52.5 72,52.5 65,45.5 65,35 68.7,31.3 70.7,31.3 73.7,28.3 73.7,27.8 80,27.8
NetC11_1 on Bottom Layer "NETC11_1_L04_P2233" (solid, pour order 2233): 79.6,57.5 79.6,79 75.5,79 75.5,76 73.506,74.006 73.3,57.5
NetC6_1 on Bottom Layer "NETC6_1_L04_P2234" (solid, pour order 2234): 7.132,79 7.132,75.632 4.15,72.65 4.15,63.1 10.9,63.1 10.9,79
GND on Bottom Layer "GND_L04_P2279" (solid, pour order 2279): 66.186,23.343 64.162,21.962 55.125,31 55.125,40.325 52.1,40.325 52.1,42.8 57.3,42.8 57.3,32.4
GND on Bottom Layer "GND_L04_P2278" (solid, pour order 2278): 66.2,0.5 64.6,0.5 64.6,24.006 66.2,24.006
GND on Bottom Layer "GND_L04_P2244" (solid, pour order 2244): 14.8,23.3 14.8,15.5 1.27,15.5 1.27,42.946 7.75,48.5 8.5,50.5 20.7,50.5 20.7,29.2
V_LED on Bottom Layer "V_LED_L04_P2276" (solid, pour order 2276): 35.8,57.5 35.8,55.6 39.4,55.6 39.4,57.9 43.05,57.9 43.05,54 32.65,54 32.65,57.5
V_LED on Bottom Layer "V_LED_L04_P2237" (solid, pour order 2237): 15,61.25 15,57 16.5,55.5 20.1,55.5 20.5,55.9 23.7,55.9 23.7,54.05 22.26,54.05 20.3,52 8.27,52 7.6,53.5 6,55 3.9,55.4 1,55.4 1,61.25
V_BUS_FTDI on Bottom Layer "V_BUS_FTDI_L04_P2248" (solid, pour order 2248): 74.5,24.9 75.5,23.9 75.5,10 67,10 67,4 84,4 84,8.5 94,8.5 94,12.5 82,12.5 82,21.5 79.5,24 79.5,25.444 78.6,26.4 74.5,26.4
V_LED on Bottom Layer "V_LED_L04_P2272" (solid, pour order 2272): 64,33.9 72.4,25.5 72.4,21.8 66.7,21.8 66.7,23.547 57.9,32.564 57.9,43.4 53,43.4 53,57 64,57
V_LED on Bottom Layer "V_LED_L04_P2240" (solid, pour order 2240): 72.65,61.25 72.65,55.65 64,47 62,47 62,61.25
CHGND on Bottom Layer "CHGND_L04_P2268" (solid, pour order 2268): 1,1 1,13.475 13.458,13.475 13.458,1
GND on Bottom Layer "GND_L04_P2262" (solid, pour order 2262): 82.5,1 101.5,1 101.5,8 109,8 109,21.5 82.5,21.5
GND on Bottom Layer "GND_L04_P2261" (solid, pour order 2261): 22.487,53.4 19.4,49.871 19.4,40.25 52.5,40.25 52.5,53.4
3V3ISO on Bottom Layer "3V3ISO_L04_P2260" (solid, pour order 2260): 21.385,40.25 21.2,40.065 21.2,23.8 55.2,23.8 55.2,40.25
V_LED on Bottom Layer "V_LED_L04_P2238" (solid, pour order 2238): 34.2,61.25 34.2,54 23.25,54 23.25,61.25
V_LED on Bottom Layer "V_LED_L04_P2239" (solid, pour order 2239): 54,61.25 54,54 42.5,54 42.5,61.25
NetC18_1 on Bottom Layer "NETC18_1_L04_P2236" (solid, pour order 2236): 65.932,79 65.932,75.932 62.75,72.75 62.75,67.5 62.5,67.25 62.5,63.5 69.7,63.5 69.7,79
NetC24_1 on Bottom Layer "NETC24_1_L04_P2235" (solid, pour order 2235): 46.332,79 46.332,75.832 43.35,72.85 43.35,63.5 50.1,63.5 50.1,79
NetC3_1 on Bottom Layer "NETC3_1_L04_P2232" (solid, pour order 2232): 60,58 60,79 55.9,79 55.9,75.429 54.5,73.929 54.5,58
NetC26_1 on Bottom Layer "NETC26_1_L04_P2231" (solid, pour order 2231): 40.6,58.3 40.6,79 36.3,79 36.3,75.8 35.5,75 35.5,58.3
NetC7_1 on Bottom Layer "NETC7_1_L04_P2230" (solid, pour order 2230): 21,58.2 21,79 16.7,79 16.7,75.676 15.9,74.973 15.9,58.2
NetC28_1 on Bottom Layer "NETC28_1_L04_P2225" (solid, pour order 2225): 26.732,79 26.732,75.732 23.75,72.75 23.75,63.5 30.5,63.5 30.5,79
CHGND on Int2 (PWR) "CHGND_L03_P2267" (solid, pour order 2267): 1,1 1,13.475 13.458,13.475 13.458,1
V_LED on Int2 (PWR) "V_LED_L03_P2264" (solid, pour order 2264): 18.5,34 10.1,34 10.1,56.5 21,56.5 21,45 18.5,45
V_LED on Int2 (PWR) "V_LED_L03_P2263" (solid, pour order 2263): 1.75,62.75 73.8,62.75 73.8,56 1.75,56
3V3 on Int2 (PWR) "3V3_L03_P2245" (solid, pour order 2245): 97.5,11 105,11 105,19.2 97.5,26.7 97.602,55.6 83,55.6 83,49 26.5,49 26.5,41.5 57.6,41.5 57.6,32.4 66.5,23.5 66.5,11
GNDISO on Int2 (PWR) "GNDISO_L03_P2223" (solid, pour order 2223): 21.385,40.25 21.2,40.065 21.2,29.25 15.2,23.25 15.2,1 64.2,1 64.2,22 55.2,31 55.2,40.25

## Keep-outs
Top Layer:
  circle w2.032: c54.5,45.3 r1.27
  region: 53.968,48.835 53.968,41.818 55.032,41.818 55.032,48.835
  lines w1.524: 15.2,8.25 15.207,1.158 ; 15.2,11.75 15.2,23.25 21.2,29.25 21.2,40.25 55.2,40.25 55.2,31 64.25,21.95 64.25,1
Int1 (GND):
  lines w1.524: 15.2,1 15.2,23.25 21.2,29.25 21.2,40.25 55.2,40.25 55.2,31 64.2,22 64.2,1.4
Int2 (PWR):
  lines w1.524: 15.2,1 15.2,23.25 21.2,29.25 21.2,40.25 55.2,40.25 55.2,31 64.2,22 64.2,1.4
Bottom Layer:
  circle w0.4: c4,51 r4
  lines w1.524: 15.2,1 15.2,23.25 21.2,29.25 21.2,40.25 55.2,40.25 55.2,31 64.2,22 64.2,1.4

## Other copper
Top Layer:
  region net 3V3: 58.551,47.986 58.551,47.05 60,47.05 60,47.986
  region net 3V3: 58.551,45.736 58.551,44.8 60,44.8 60,45.736
  region net 3V3: 57.551,48.55 57.551,42.05 59,42.05 59,48.55
  region net 3V3: 58.551,43.486 58.551,42.55 60,42.55 60,43.486
  region net NetC15_2: 49.5,43.486 49.5,42.55 50.949,42.55 50.949,43.486
  region net NetC15_2: 49.5,45.736 49.5,44.8 50.949,44.8 50.949,45.736
  region net NetC15_2: 49.5,47.986 49.5,47.05 50.949,47.05 50.949,47.986
  region net NetC15_2: 51.699,42.05 51.699,48.55 50.25,48.55 50.25,42.05
  region net V_BUS_FTDI: 93.225,6.419 93.225,7.719 92.925,7.719 92.625,7.719 92.625,6.419 92.925,6.419
  region net V_BUS_FTDI: 88.425,6.418 88.425,7.718 88.125,7.718 87.825,7.718 87.825,6.418 88.125,6.418
  region net GND: 87.625,6.419 87.625,7.719 87.325,7.719 87.325,7.718 87.025,7.718 87.025,6.418 87.325,6.418 87.325,6.419
  region net GND: 93.425,7.719 93.425,6.419 93.725,6.419 94.025,6.419 94.025,7.719 93.725,7.719
  region net NetJP1_2: 86.301,22.2 86.801,21.7 86.301,21.2 86.957,21.2 86.957,20.8 86.301,20.8 86.801,20.3 86.301,19.8 87.625,19.8 87.625,20.8 87.274,20.8 87.274,21.2 87.625,21.2 87.625,22.2
  region net FTDI.RX: 85.575,20.8 85.949,20.8 86.449,20.3 85.949,19.8 85.225,19.8 85.225,20.8
  region net FTDI.TX: 85.575,22.2 85.949,22.2 86.449,21.7 85.949,21.2 85.225,21.2 85.225,22.2
  region net NetJP3_2: 64.199,41.3 63.699,41.8 64.199,42.3 63.543,42.3 63.543,42.7 64.199,42.7 63.699,43.2 64.199,43.7 62.875,43.7 62.875,42.7 63.226,42.7 63.226,42.3 62.875,42.3 62.875,41.3
  region net NetJP3_1: 64.925,41.3 64.551,41.3 64.051,41.8 64.551,42.3 65.275,42.3 65.275,41.3
  region net V_SYS: 64.925,42.7 64.551,42.7 64.051,43.2 64.551,43.7 65.275,43.7 65.275,42.7
  region net NetJP5_2: 86.259,40.435 86.759,39.935 86.259,39.435 86.915,39.435 86.915,39.035 86.259,39.035 86.759,38.535 86.259,38.035 87.583,38.035 87.583,39.035 87.232,39.035 87.232,39.435 87.583,39.435 87.583,40.435
  region net 3V3: 85.533,39.035 85.907,39.035 86.407,38.535 85.907,38.035 85.183,38.035 85.183,39.035
  region net GND: 85.533,40.435 85.907,40.435 86.407,39.935 85.907,39.435 85.183,39.435 85.183,40.435
  region net FTDI.TX: 85.75,25 86.124,25 86.624,24.5 86.124,24 85.4,24 85.4,25
  region net FTDI.RX: 85.75,26.4 86.124,26.4 86.624,25.9 86.124,25.4 85.4,25.4 85.4,26.4
  region net NetJP2_2: 86.476,26.4 86.976,25.9 86.476,25.4 87.132,25.4 87.132,25 86.476,25 86.976,24.5 86.476,24 87.8,24 87.8,25 87.449,25 87.449,25.4 87.8,25.4 87.8,26.4
  region net NetJP4_2: 86,52.176 86.5,52.676 87,52.176 87,52.832 87.4,52.832 87.4,52.176 87.9,52.676 88.4,52.176 88.4,53.5 87.4,53.5 87.4,53.149 87,53.149 87,53.5 86,53.5
  region net 3V3: 87.4,51.45 87.4,51.824 87.9,52.324 88.4,51.824 88.4,51.1 87.4,51.1
  region net GND: 86,51.45 86,51.824 86.5,52.324 87,51.824 87,51.1 86,51.1
Bottom Layer:
  pour cut-out: 68.4,45.4 68.4,42 76.3,42 76.3,45.4

## Silkscreen, mask and mechanical layers (free items; w line width, h text height)
Top Overlay:
  lines w0.127: 0.98,66.363 ccw(c5.5,68.5) 1.012,70.705
  lines w0.15: 84.135,68.919 84.8,71.2 ; 84.292,72.307 84.8,72.9 ; 84.3,76.5 84.7,76 ; 84.4,74.4 84.8,74.4 ; 89.6,50.2 93.2,48.4
  text "+ D7 -" at 18.94,75.3 h3.05 r180
  text "+ D1 -" at 77.74,75.3 h3.05 r180
  text "+ D8 -" at 9.14,75.282 h3.05 r180
  text "+ D6 -" at 28.74,75.279 h3.05 r180
  text "+ D5 -" at 38.54,75.279 h3.05 r180
  text "+ D3 -" at 58.14,75.277 h3.05 r180
  text "+ D4 -" at 48.29,75.25 h3.05 r180
  text "+ D2 -" at 67.871,75.228 h3.05 r180
  text "GND" at 103.201,70.916 h2.29
  text "P12" at 102.9,68.405 h2.29
  text "P13" at 102.9,65.876 h2.29
  text "P14" at 102.9,63.32 h2.29
  text "P15" at 102.9,60.795 h2.29
  text "P16" at 102.9,58.258 h2.29
  text "GND" at 103.001,54.516 h2.29
  text "LED Strip / DMX Interface v2" at 10.5,53.6 h3.81
  text "RUN" at 101.5,52.015 h2.29
  text "GND" at 9.782,48.031 h2.29 r90
  text "VLED" at 12.5,47.949 h2.29 r90
  text "BTN1" at 102.001,44 h2.29
  text "GND" at 101.751,40.546 h2.29
  text "PWM3" at 101.75,38.006 h2.29
  text "PWM2" at 101.75,35.455 h2.29
  text "TX" at 25.451,34.25 h2.29
  text "EN" at 30.7,34.25 h2.29
  text "RX" at 35.95,34.25 h2.29
  text "PWM1" at 101.75,32.91 h2.29
  text "GND" at 101.751,30.386 h2.29
  text "BL" at 101.751,27.03 h2.29
  text "CS" at 101.751,24.517 h2.29
  text "DC" at 101.75,21.977 h2.29
  text "Output" at 51.5,21.6 h2.29
  text "Input" at 20.7,20.25 h2.29
  text "RES" at 101.75,19.425 h2.29
  text "MOSI" at 102,17.521 h2.29
  text "SCK" at 103,15.527 h2.29
  text "3V3" at 102.484,14.5 h2.29 r90
  text "GND" at 102.484,5.251 h2.29 r90
Top Solder:
  region: 51.699,42.05 51.699,48.55 50.25,48.55 50.25,42.05
  region: 57.551,48.55 57.551,42.05 59,42.05 59,48.55
Mechanical 1:
  lines w0.15: 0,80.23 cw(c1.27,80.23) 1.27,81.5 108.73,81.5 cw(c108.73,80.23) 110,80.23 110,1.27 cw(c108.73,1.27) 108.73,0 ; 0,80.23 0,80.23 ; 0,80.23 0,46.27 ccw(c1.27,46.27) 1.27,45 3.73,45 cw(c3.73,43.73) 5,43.73 5,35.77 cw(c3.73,35.77) 3.73,34.5 2.5,34.5 1.27,34.5 ccw(c1.27,33.23) 0,33.23 0,1.27 ccw(c1.27,1.27) 1.27,0 108.73,0 ; 108.73,0 108.73,0
Mechanical 7:
  lines w0.152: 23,24.75 82.75,24.75
Mechanical 14:
  circle w0.254: c4,51 r3.429
  circle w0.254: c106,77 r3.429
  circle w0.254: c106,4 r3.429
  circle w0.254: c4,4 r3.429